# EAGLE board Qwiic-Bluetooth-HC1X-Panel (EAGLE 9.0.1), part 1 of 2
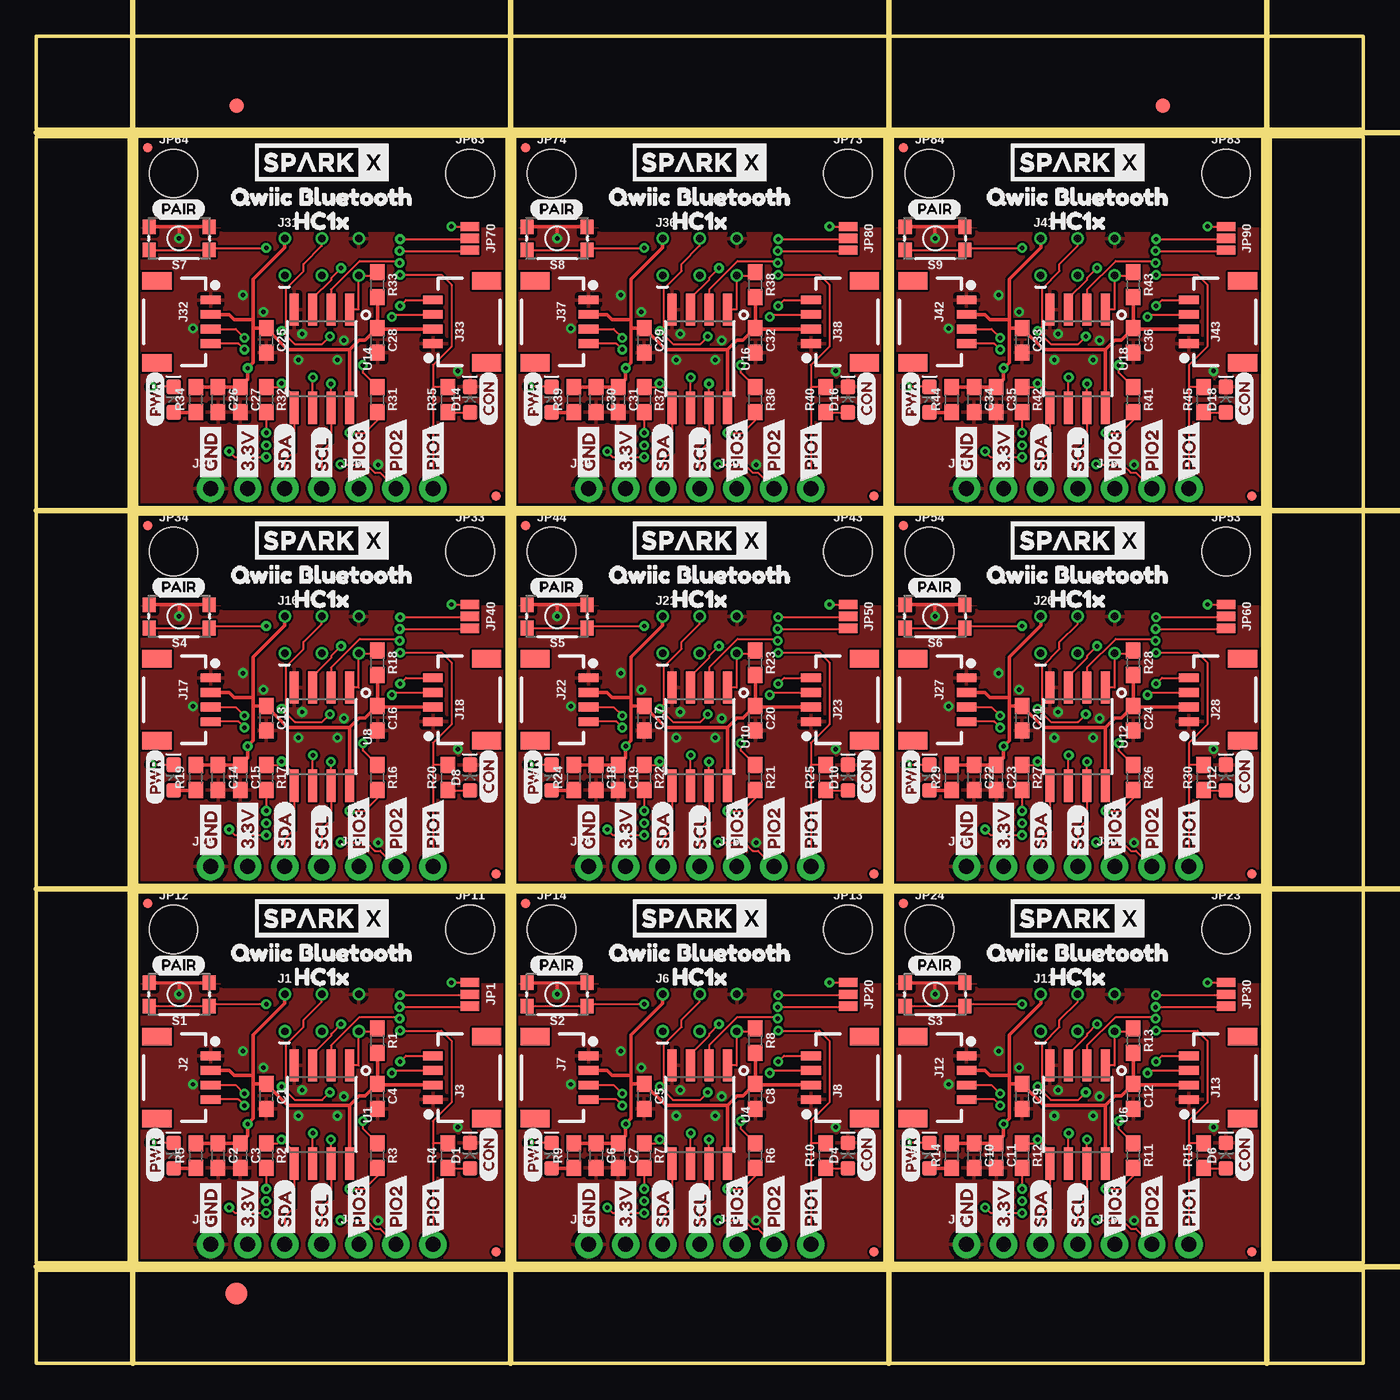
[diagram p0: board, top side]
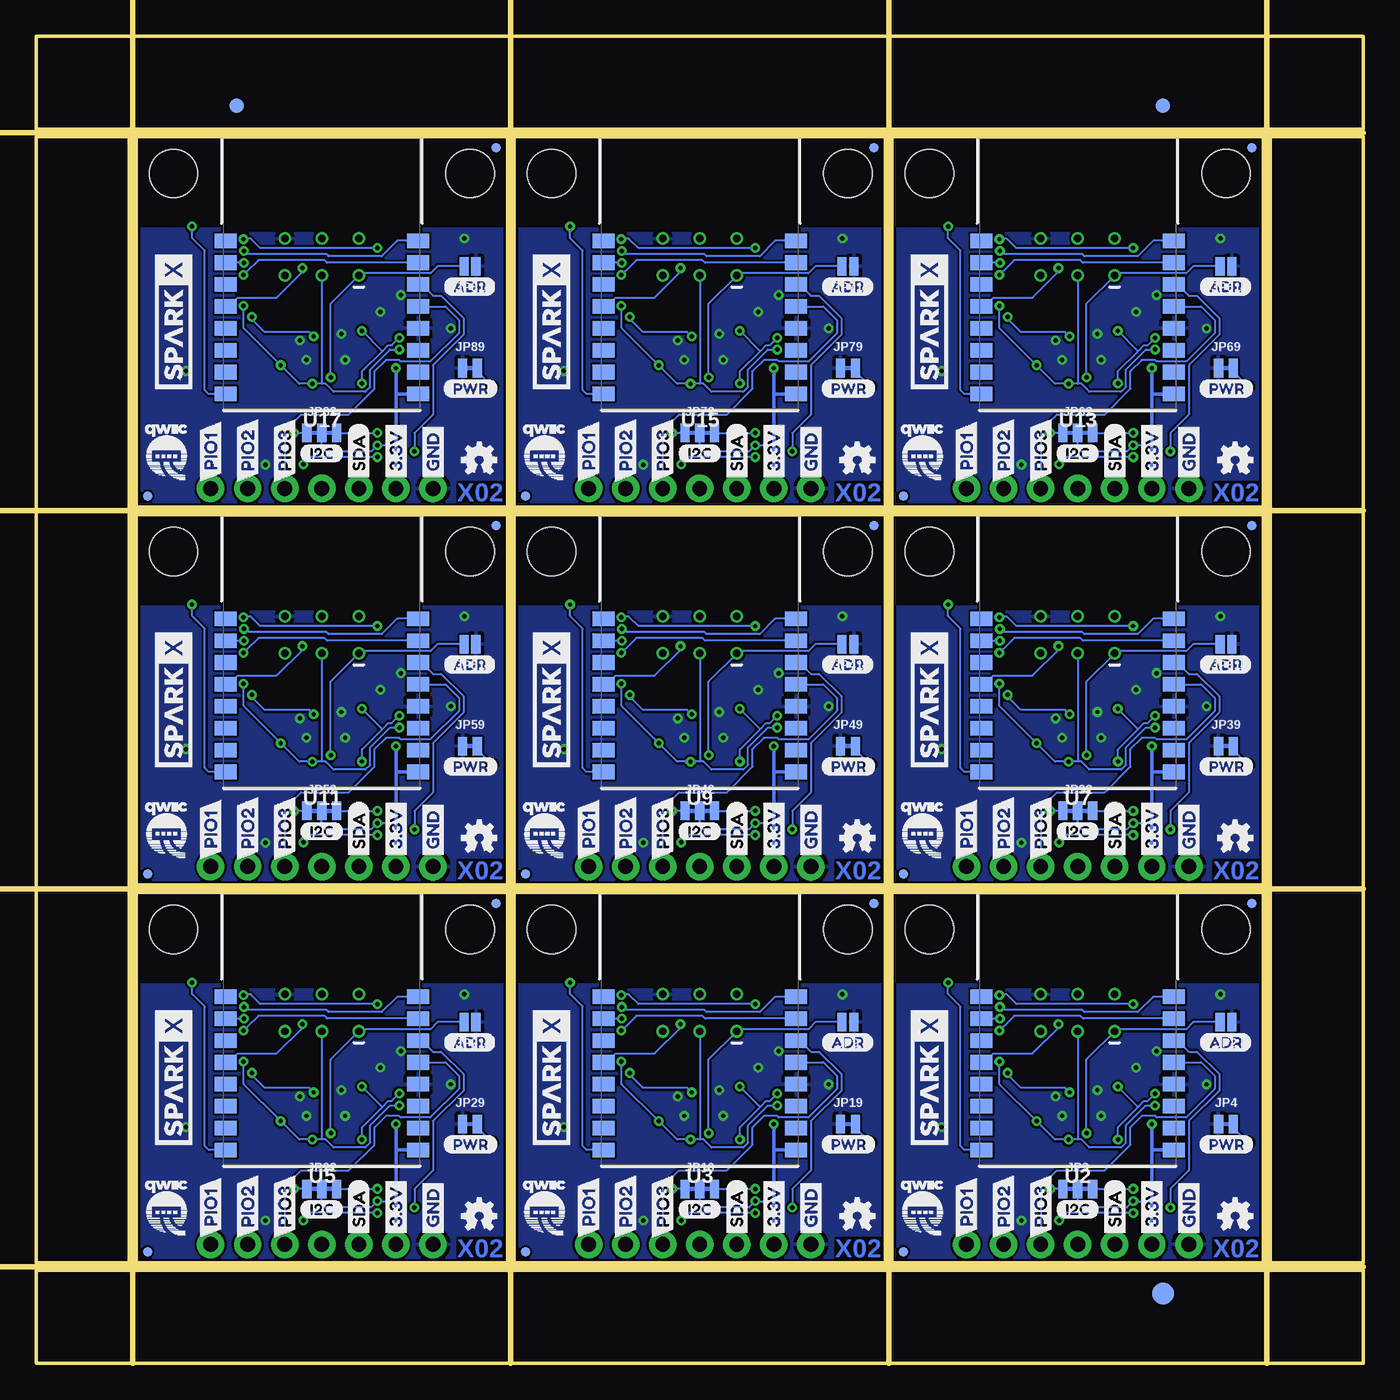
[diagram p1: board, bottom side, seen from below]

Size 90.93 x 90.93 mm. Coordinates in mm from the lower left corner, seen from the top.
Outline: 6.86,6.86 32.26,6.86 32.26,32.26 6.86,32.26 6.86,6.86
Outline: 32.77,6.86 58.17,6.86 58.17,32.26 32.77,32.26 32.77,6.86
Outline: 58.67,6.86 84.07,6.86 84.07,32.26 58.67,32.26 58.67,6.86
Outline: 6.86,32.77 32.26,32.77 32.26,58.17 6.86,58.17 6.86,32.77
Outline: 32.77,32.77 58.17,32.77 58.17,58.17 32.77,58.17 32.77,32.77
Outline: 58.67,32.77 84.07,32.77 84.07,58.17 58.67,58.17 58.67,32.77
Outline: 6.86,58.67 32.26,58.67 32.26,84.07 6.86,84.07 6.86,58.67
Outline: 32.77,58.67 58.17,58.67 58.17,84.07 32.77,84.07 32.77,58.67
Outline: 58.67,58.67 84.07,58.67 84.07,84.07 58.67,84.07 58.67,58.67
Outline: 0,6.35 90.93,6.35 90.93,0 0,0 0,6.35
Outline: 84.58,84.07 90.93,84.07 90.93,6.86 84.58,6.86 84.58,84.07
Outline: 0,90.93 90.93,90.93 90.93,84.58 0,84.58 0,90.93
Outline: 0,84.07 6.35,84.07 6.35,6.86 0,6.86 0,84.07
Copper layers (1*16): Top 0.035mm / dielectric 1.5mm / Bottom 0.035mm
Design rules "SparkFun-2-layer-PCBWay-LIMIT": minimum track width 6mil, minimum drill 0.3mm, track to track 6mil, track to pad 6mil, pad to pad 6mil, via to via 6mil, smd to smd 6mil, copper to edge 6mil, drill to drill 6mil, minimum pad ring 7mil, minimum via ring 7mil, stop-mask expansion 4mil, vias tented up to drill 25mil, thermal gap 10mil
Milling: 8 lines

## Footprints (pad centres in the part's own frame; a part is rotated, then mirrored left to right if it is on the bottom)
0603 = smd 1.1 x 1: 1 -0.85,0; 2 0.85,0
LED-0603 = smd 1 x 1: A -0.877,0; C 0.877,0
FIDUCIAL-1X2 = smd 1 x 1: 1 0,0
FIDUCIAL-1.5X3 = smd 1.5 x 1.5: 1 0,0
2X3_TEST_POINTS = drill 0.508: 1 -2.54,-1.27; 2 -2.54,1.27; 3 0,-1.27; 4 0,1.27; 5 2.54,-1.27; 6 2.54,1.27
1X04_1MM_RA = smd 0.6 x 1.35: 1 -1.5,0; 2 -0.5,0; 3 0.5,0; 4 1.5,0 | smd 1.2 x 2: NC1 2.8,-3.675; NC2 -2.8,-3.675
1X04_NO_SILK = drill 1.016 pad 1.88: 1 0,0; 2 2.54,0; 3 5.08,0; 4 7.62,0
1X03_NO_SILK = drill 1.016 pad 1.88: 1 0,0; 2 2.54,0; 3 5.08,0
SMT-JUMPER_3_1-NC_PASTE_NO-SILK = smd 0.635 x 1.27: 1 -0.813,0; 2 0,0; 3 0.813,0
SMT-JUMPER_2_NO_NO-SILK = smd 0.635 x 1.27: 1 -0.406,0; 2 0.406,0
SMT-JUMPER_3_2-NC_TRACE_NO-SILK = smd 0.635 x 1.27: 1 -1.016,0; 2 0,0; 3 1.016,0
SMT-JUMPER_2_NC_TRACE_NO-SILK = smd 0.635 x 1.27: 1 -0.508,0; 2 0.508,0
FIDUCIAL-MICRO = smd 0.635 x 0.635: 1 0,0
STAND-OFF = hole 3.302: 0,0
TACTILE_SWITCH_SMD_4.6X2.8MM = smd 0.9 x 1: 1 -2.05,-0.8; 2 2.05,-0.8; 3 2.05,0.8; 4 -2.05,0.8
SO08-EIAJ_MCU = smd 0.61 x 2.21: 1 -1.905,-3.378; 2 -0.635,-3.378; 3 0.635,-3.378; 4 1.905,-3.378; 5 1.905,3.353; 6 0.635,3.353; 7 -0.635,3.353; 8 -1.905,3.353
HM-11 = smd 1.5 x 1: 1 -6.6,2.25; 2 -6.6,0.75; 3 -6.6,-0.75; 4 -6.6,-2.25; 5 -6.6,-3.75; 6 -6.6,-5.25; 7 -6.6,-6.75; 8 -6.6,-8.25; 9 6.6,-8.25; 10 6.6,-6.75; 11 6.6,-5.25; 12 6.6,-3.75; 13 6.6,-2.25; 14 6.6,-0.75; 15 6.6,0.75; 16 6.6,2.25

## Placement (x,y rotation side)
C1  0.1uF  [0603]  15.75,18.29 270 top
C2  0.1uF  [0603]  12.45,14.22 270 top
C3  4.7uF  [0603]  13.97,14.22 270 top
C4  10uF  [0603]  23.37,18.29 270 top
C5  0.1uF  [0603]  41.66,18.29 270 top
C6  0.1uF  [0603]  38.35,14.22 270 top
C7  4.7uF  [0603]  39.88,14.22 270 top
C8  10uF  [0603]  49.28,18.29 270 top
C9  0.1uF  [0603]  67.56,18.29 270 top
C10  0.1uF  [0603]  64.26,14.22 270 top
C11  4.7uF  [0603]  65.79,14.22 270 top
C12  10uF  [0603]  75.18,18.29 270 top
C13  0.1uF  [0603]  15.75,44.2 270 top
C14  0.1uF  [0603]  12.45,40.13 270 top
C15  4.7uF  [0603]  13.97,40.13 270 top
C16  10uF  [0603]  23.37,44.2 270 top
C17  0.1uF  [0603]  41.66,44.2 270 top
C18  0.1uF  [0603]  38.35,40.13 270 top
C19  4.7uF  [0603]  39.88,40.13 270 top
C20  10uF  [0603]  49.28,44.2 270 top
C21  0.1uF  [0603]  67.56,44.2 270 top
C22  0.1uF  [0603]  64.26,40.13 270 top
C23  4.7uF  [0603]  65.79,40.13 270 top
C24  10uF  [0603]  75.18,44.2 270 top
C25  0.1uF  [0603]  15.75,70.1 270 top
C26  0.1uF  [0603]  12.45,66.04 270 top
C27  4.7uF  [0603]  13.97,66.04 270 top
C28  10uF  [0603]  23.37,70.1 270 top
C29  0.1uF  [0603]  41.66,70.1 270 top
C30  0.1uF  [0603]  38.35,66.04 270 top
C31  4.7uF  [0603]  39.88,66.04 270 top
C32  10uF  [0603]  49.28,70.1 270 top
C33  0.1uF  [0603]  67.56,70.1 270 top
C34  0.1uF  [0603]  64.26,66.04 270 top
C35  4.7uF  [0603]  65.79,66.04 270 top
C36  10uF  [0603]  75.18,70.1 270 top
D1  GREEN  [LED-0603]  29.72,14.22 90 top
D2  RED  [LED-0603]  9.4,14.22 90 top
D3  RED  [LED-0603]  35.31,14.22 90 top
D4  GREEN  [LED-0603]  55.63,14.22 90 top
D5  RED  [LED-0603]  61.21,14.22 90 top
D6  GREEN  [LED-0603]  81.53,14.22 90 top
D7  RED  [LED-0603]  9.4,40.13 90 top
D8  GREEN  [LED-0603]  29.72,40.13 90 top
D9  RED  [LED-0603]  35.31,40.13 90 top
D10  GREEN  [LED-0603]  55.63,40.13 90 top
D11  RED  [LED-0603]  61.21,40.13 90 top
D12  GREEN  [LED-0603]  81.53,40.13 90 top
D13  RED  [LED-0603]  9.4,66.04 90 top
D14  GREEN  [LED-0603]  29.72,66.04 90 top
D15  RED  [LED-0603]  35.31,66.04 90 top
D16  GREEN  [LED-0603]  55.63,66.04 90 top
D17  RED  [LED-0603]  61.21,66.04 90 top
D18  GREEN  [LED-0603]  81.53,66.04 90 top
E$1  [FIDUCIAL-1X2]  13.72,86.17 0 top
E$2  [FIDUCIAL-1X2]  13.72,86.17 0 bottom
E$3  [FIDUCIAL-1X2]  77.22,86.17 0 top
E$4  [FIDUCIAL-1X2]  77.22,86.17 0 bottom
E$5  [FIDUCIAL-1.5X3]  13.72,4.76 0 top
E$6  [FIDUCIAL-1.5X3]  13.72,4.76 0 bottom
J1  ISP  [2X3_TEST_POINTS]  19.56,24 0 top
J2  Qwiic-L  [1X04_1MM_RA]  11.94,19.56 270 top
J3  Qwiic-R  [1X04_1MM_RA]  27.18,19.56 90 top
J4  I2C  [1X04_NO_SILK]  11.94,8.13 0 top
J5  PIO  [1X03_NO_SILK]  22.1,8.13 0 top
J6  ISP  [2X3_TEST_POINTS]  45.47,24 0 top
J7  Qwiic-L  [1X04_1MM_RA]  37.85,19.56 270 top
J8  Qwiic-R  [1X04_1MM_RA]  53.09,19.56 90 top
J9  I2C  [1X04_NO_SILK]  37.85,8.13 0 top
J10  PIO  [1X03_NO_SILK]  48.01,8.13 0 top
J11  ISP  [2X3_TEST_POINTS]  71.37,24 0 top
J12  Qwiic-L  [1X04_1MM_RA]  63.75,19.56 270 top
J13  Qwiic-R  [1X04_1MM_RA]  78.99,19.56 90 top
J14  I2C  [1X04_NO_SILK]  63.75,8.13 0 top
J15  PIO  [1X03_NO_SILK]  73.91,8.13 0 top
J16  ISP  [2X3_TEST_POINTS]  19.56,49.91 0 top
J17  Qwiic-L  [1X04_1MM_RA]  11.94,45.47 270 top
J18  Qwiic-R  [1X04_1MM_RA]  27.18,45.47 90 top
J19  I2C  [1X04_NO_SILK]  11.94,34.04 0 top
J20  PIO  [1X03_NO_SILK]  22.1,34.04 0 top
J21  ISP  [2X3_TEST_POINTS]  45.47,49.91 0 top
J22  Qwiic-L  [1X04_1MM_RA]  37.85,45.47 270 top
J23  Qwiic-R  [1X04_1MM_RA]  53.09,45.47 90 top
J24  I2C  [1X04_NO_SILK]  37.85,34.04 0 top
J25  PIO  [1X03_NO_SILK]  48.01,34.04 0 top
J26  ISP  [2X3_TEST_POINTS]  71.37,49.91 0 top
J27  Qwiic-L  [1X04_1MM_RA]  63.75,45.47 270 top
J28  Qwiic-R  [1X04_1MM_RA]  78.99,45.47 90 top
J29  I2C  [1X04_NO_SILK]  63.75,34.04 0 top
J30  PIO  [1X03_NO_SILK]  73.91,34.04 0 top
J31  ISP  [2X3_TEST_POINTS]  19.56,75.82 0 top
J32  Qwiic-L  [1X04_1MM_RA]  11.94,71.37 270 top
J33  Qwiic-R  [1X04_1MM_RA]  27.18,71.37 90 top
J34  I2C  [1X04_NO_SILK]  11.94,59.94 0 top
J35  PIO  [1X03_NO_SILK]  22.1,59.94 0 top
J36  ISP  [2X3_TEST_POINTS]  45.47,75.82 0 top
J37  Qwiic-L  [1X04_1MM_RA]  37.85,71.37 270 top
J38  Qwiic-R  [1X04_1MM_RA]  53.09,71.37 90 top
J39  I2C  [1X04_NO_SILK]  37.85,59.94 0 top
J40  PIO  [1X03_NO_SILK]  48.01,59.94 0 top
J41  ISP  [2X3_TEST_POINTS]  71.37,75.82 0 top
J42  Qwiic-L  [1X04_1MM_RA]  63.75,71.37 270 top
J43  Qwiic-R  [1X04_1MM_RA]  78.99,71.37 90 top
J44  I2C  [1X04_NO_SILK]  63.75,59.94 0 top
J45  PIO  [1X03_NO_SILK]  73.91,59.94 0 top
JP1  Key-Select  [SMT-JUMPER_3_1-NC_PASTE_NO-SILK]  29.72,25.27 270 top
JP2  ADR  [SMT-JUMPER_2_NO_NO-SILK]  9.4,23.37 180 bottom
JP3  I2C  [SMT-JUMPER_3_2-NC_TRACE_NO-SILK]  19.56,11.94 0 bottom
JP4  PWR-LED  [SMT-JUMPER_2_NC_TRACE_NO-SILK]  9.4,16.38 0 bottom
JP5  FIDUCIALUFIDUCIAL  [FIDUCIAL-MICRO]  31.5,7.62 0 bottom
JP6  FIDUCIALUFIDUCIAL  [FIDUCIAL-MICRO]  31.5,7.62 0 top
JP7  FIDUCIALUFIDUCIAL  [FIDUCIAL-MICRO]  7.62,31.5 0 top
JP8  FIDUCIALUFIDUCIAL  [FIDUCIAL-MICRO]  7.62,31.5 0 bottom
JP9  ADR  [SMT-JUMPER_2_NO_NO-SILK]  35.31,23.37 180 bottom
JP10  I2C  [SMT-JUMPER_3_2-NC_TRACE_NO-SILK]  45.47,11.94 0 bottom
JP11  STAND-OFF  [STAND-OFF]  29.72,29.72 0 top
JP12  STAND-OFF  [STAND-OFF]  9.4,29.72 0 top
JP13  STAND-OFF  [STAND-OFF]  55.63,29.72 0 top
JP14  STAND-OFF  [STAND-OFF]  35.31,29.72 0 top
JP15  FIDUCIALUFIDUCIAL  [FIDUCIAL-MICRO]  57.4,7.62 0 bottom
JP16  FIDUCIALUFIDUCIAL  [FIDUCIAL-MICRO]  33.53,31.5 0 top
JP17  FIDUCIALUFIDUCIAL  [FIDUCIAL-MICRO]  33.53,31.5 0 bottom
JP18  FIDUCIALUFIDUCIAL  [FIDUCIAL-MICRO]  57.4,7.62 0 top
JP19  PWR-LED  [SMT-JUMPER_2_NC_TRACE_NO-SILK]  35.31,16.38 0 bottom
JP20  Key-Select  [SMT-JUMPER_3_1-NC_PASTE_NO-SILK]  55.63,25.27 270 top
JP21  ADR  [SMT-JUMPER_2_NO_NO-SILK]  61.21,23.37 180 bottom
JP22  I2C  [SMT-JUMPER_3_2-NC_TRACE_NO-SILK]  71.37,11.94 0 bottom
JP23  STAND-OFF  [STAND-OFF]  81.53,29.72 0 top
JP24  STAND-OFF  [STAND-OFF]  61.21,29.72 0 top
JP25  FIDUCIALUFIDUCIAL  [FIDUCIAL-MICRO]  83.31,7.62 0 bottom
JP26  FIDUCIALUFIDUCIAL  [FIDUCIAL-MICRO]  59.44,31.5 0 top
JP27  FIDUCIALUFIDUCIAL  [FIDUCIAL-MICRO]  59.44,31.5 0 bottom
JP28  FIDUCIALUFIDUCIAL  [FIDUCIAL-MICRO]  83.31,7.62 0 top
JP29  PWR-LED  [SMT-JUMPER_2_NC_TRACE_NO-SILK]  61.21,16.38 0 bottom
JP30  Key-Select  [SMT-JUMPER_3_1-NC_PASTE_NO-SILK]  81.53,25.27 270 top
JP31  ADR  [SMT-JUMPER_2_NO_NO-SILK]  9.4,49.28 180 bottom
JP32  I2C  [SMT-JUMPER_3_2-NC_TRACE_NO-SILK]  19.56,37.85 0 bottom
JP33  STAND-OFF  [STAND-OFF]  29.72,55.63 0 top
JP34  STAND-OFF  [STAND-OFF]  9.4,55.63 0 top
JP35  FIDUCIALUFIDUCIAL  [FIDUCIAL-MICRO]  31.5,33.53 0 bottom
JP36  FIDUCIALUFIDUCIAL  [FIDUCIAL-MICRO]  7.62,57.4 0 top
JP37  FIDUCIALUFIDUCIAL  [FIDUCIAL-MICRO]  7.62,57.4 0 bottom
JP38  FIDUCIALUFIDUCIAL  [FIDUCIAL-MICRO]  31.5,33.53 0 top
JP39  PWR-LED  [SMT-JUMPER_2_NC_TRACE_NO-SILK]  9.4,42.29 0 bottom
JP40  Key-Select  [SMT-JUMPER_3_1-NC_PASTE_NO-SILK]  29.72,51.18 270 top
JP41  ADR  [SMT-JUMPER_2_NO_NO-SILK]  35.31,49.28 180 bottom
JP42  I2C  [SMT-JUMPER_3_2-NC_TRACE_NO-SILK]  45.47,37.85 0 bottom
JP43  STAND-OFF  [STAND-OFF]  55.63,55.63 0 top
JP44  STAND-OFF  [STAND-OFF]  35.31,55.63 0 top
JP45  FIDUCIALUFIDUCIAL  [FIDUCIAL-MICRO]  57.4,33.53 0 bottom
JP46  FIDUCIALUFIDUCIAL  [FIDUCIAL-MICRO]  33.53,57.4 0 top
JP47  FIDUCIALUFIDUCIAL  [FIDUCIAL-MICRO]  33.53,57.4 0 bottom
JP48  FIDUCIALUFIDUCIAL  [FIDUCIAL-MICRO]  57.4,33.53 0 top
JP49  PWR-LED  [SMT-JUMPER_2_NC_TRACE_NO-SILK]  35.31,42.29 0 bottom
JP50  Key-Select  [SMT-JUMPER_3_1-NC_PASTE_NO-SILK]  55.63,51.18 270 top
JP51  ADR  [SMT-JUMPER_2_NO_NO-SILK]  61.21,49.28 180 bottom
JP52  I2C  [SMT-JUMPER_3_2-NC_TRACE_NO-SILK]  71.37,37.85 0 bottom
JP53  STAND-OFF  [STAND-OFF]  81.53,55.63 0 top
JP54  STAND-OFF  [STAND-OFF]  61.21,55.63 0 top
JP55  FIDUCIALUFIDUCIAL  [FIDUCIAL-MICRO]  83.31,33.53 0 bottom
JP56  FIDUCIALUFIDUCIAL  [FIDUCIAL-MICRO]  59.44,57.4 0 top
JP57  FIDUCIALUFIDUCIAL  [FIDUCIAL-MICRO]  59.44,57.4 0 bottom
JP58  FIDUCIALUFIDUCIAL  [FIDUCIAL-MICRO]  83.31,33.53 0 top
JP59  PWR-LED  [SMT-JUMPER_2_NC_TRACE_NO-SILK]  61.21,42.29 0 bottom
JP60  Key-Select  [SMT-JUMPER_3_1-NC_PASTE_NO-SILK]  81.53,51.18 270 top
JP61  ADR  [SMT-JUMPER_2_NO_NO-SILK]  9.4,75.18 180 bottom
JP62  I2C  [SMT-JUMPER_3_2-NC_TRACE_NO-SILK]  19.56,63.75 0 bottom
JP63  STAND-OFF  [STAND-OFF]  29.72,81.53 0 top
JP64  STAND-OFF  [STAND-OFF]  9.4,81.53 0 top
JP65  FIDUCIALUFIDUCIAL  [FIDUCIAL-MICRO]  31.5,59.44 0 bottom
JP66  FIDUCIALUFIDUCIAL  [FIDUCIAL-MICRO]  7.62,83.31 0 top
JP67  FIDUCIALUFIDUCIAL  [FIDUCIAL-MICRO]  7.62,83.31 0 bottom
JP68  FIDUCIALUFIDUCIAL  [FIDUCIAL-MICRO]  31.5,59.44 0 top
JP69  PWR-LED  [SMT-JUMPER_2_NC_TRACE_NO-SILK]  9.4,68.2 0 bottom
JP70  Key-Select  [SMT-JUMPER_3_1-NC_PASTE_NO-SILK]  29.72,77.09 270 top
JP71  ADR  [SMT-JUMPER_2_NO_NO-SILK]  35.31,75.18 180 bottom
JP72  I2C  [SMT-JUMPER_3_2-NC_TRACE_NO-SILK]  45.47,63.75 0 bottom
JP73  STAND-OFF  [STAND-OFF]  55.63,81.53 0 top
JP74  STAND-OFF  [STAND-OFF]  35.31,81.53 0 top
JP75  FIDUCIALUFIDUCIAL  [FIDUCIAL-MICRO]  57.4,59.44 0 bottom
JP76  FIDUCIALUFIDUCIAL  [FIDUCIAL-MICRO]  33.53,83.31 0 top
JP77  FIDUCIALUFIDUCIAL  [FIDUCIAL-MICRO]  33.53,83.31 0 bottom
JP78  FIDUCIALUFIDUCIAL  [FIDUCIAL-MICRO]  57.4,59.44 0 top
JP79  PWR-LED  [SMT-JUMPER_2_NC_TRACE_NO-SILK]  35.31,68.2 0 bottom
JP80  Key-Select  [SMT-JUMPER_3_1-NC_PASTE_NO-SILK]  55.63,77.09 270 top
JP81  ADR  [SMT-JUMPER_2_NO_NO-SILK]  61.21,75.18 180 bottom
JP82  I2C  [SMT-JUMPER_3_2-NC_TRACE_NO-SILK]  71.37,63.75 0 bottom
JP83  STAND-OFF  [STAND-OFF]  81.53,81.53 0 top
JP84  STAND-OFF  [STAND-OFF]  61.21,81.53 0 top
JP85  FIDUCIALUFIDUCIAL  [FIDUCIAL-MICRO]  83.31,59.44 0 bottom
JP86  FIDUCIALUFIDUCIAL  [FIDUCIAL-MICRO]  59.44,83.31 0 top
JP87  FIDUCIALUFIDUCIAL  [FIDUCIAL-MICRO]  59.44,83.31 0 bottom
JP88  FIDUCIALUFIDUCIAL  [FIDUCIAL-MICRO]  83.31,59.44 0 top
JP89  PWR-LED  [SMT-JUMPER_2_NC_TRACE_NO-SILK]  61.21,68.2 0 bottom
JP90  Key-Select  [SMT-JUMPER_3_1-NC_PASTE_NO-SILK]  81.53,77.09 270 top
LOGO1  OSHW-LOGOMINI  [OSHW-LOGO-MINI]  8.76,10.1 0 bottom
LOGO2  SPARKX-LOGO4  [SPARKX-MEDIUM]  29.72,19.56 90 bottom
LOGO3  SPARKX-LOGO4  [SPARKX-MEDIUM]  19.56,30.48 0 top
LOGO4  SPARKX-LOGO4  [SPARKX-MEDIUM]  45.47,30.48 0 top
LOGO5  OSHW-LOGOMINI  [OSHW-LOGO-MINI]  34.67,10.1 0 bottom
LOGO6  SPARKX-LOGO4  [SPARKX-MEDIUM]  55.63,19.56 90 bottom
LOGO7  SPARKX-LOGO4  [SPARKX-MEDIUM]  71.37,30.48 0 top
LOGO8  OSHW-LOGOMINI  [OSHW-LOGO-MINI]  60.58,10.1 0 bottom
LOGO9  SPARKX-LOGO4  [SPARKX-MEDIUM]  81.53,19.56 90 bottom
LOGO10  SPARKX-LOGO4  [SPARKX-MEDIUM]  19.56,56.39 0 top
LOGO11  OSHW-LOGOMINI  [OSHW-LOGO-MINI]  8.76,36 0 bottom
LOGO12  SPARKX-LOGO4  [SPARKX-MEDIUM]  29.72,45.47 90 bottom
LOGO13  SPARKX-LOGO4  [SPARKX-MEDIUM]  45.47,56.39 0 top
LOGO14  OSHW-LOGOMINI  [OSHW-LOGO-MINI]  34.67,36 0 bottom
LOGO15  SPARKX-LOGO4  [SPARKX-MEDIUM]  55.63,45.47 90 bottom
LOGO16  SPARKX-LOGO4  [SPARKX-MEDIUM]  71.37,56.39 0 top
LOGO17  OSHW-LOGOMINI  [OSHW-LOGO-MINI]  60.58,36 0 bottom
LOGO18  SPARKX-LOGO4  [SPARKX-MEDIUM]  81.53,45.47 90 bottom
LOGO19  SPARKX-LOGO4  [SPARKX-MEDIUM]  19.56,82.3 0 top
LOGO20  OSHW-LOGOMINI  [OSHW-LOGO-MINI]  8.76,61.91 0 bottom
LOGO21  SPARKX-LOGO4  [SPARKX-MEDIUM]  29.72,71.37 90 bottom
LOGO22  SPARKX-LOGO4  [SPARKX-MEDIUM]  45.47,82.3 0 top
LOGO23  OSHW-LOGOMINI  [OSHW-LOGO-MINI]  34.67,61.91 0 bottom
LOGO24  SPARKX-LOGO4  [SPARKX-MEDIUM]  55.63,71.37 90 bottom
LOGO25  SPARKX-LOGO4  [SPARKX-MEDIUM]  71.37,82.3 0 top
LOGO26  OSHW-LOGOMINI  [OSHW-LOGO-MINI]  60.58,61.91 0 bottom
LOGO27  SPARKX-LOGO4  [SPARKX-MEDIUM]  81.53,71.37 90 bottom
R1  4.7k  [0603]  23.37,22.1 270 top
R2  2.2k  [0603]  15.75,14.22 270 top
R3  2.2k  [0603]  23.37,14.22 270 top
R4  330  [0603]  28.19,14.22 90 top
R5  1k  [0603]  10.92,14.22 90 top
R6  2.2k  [0603]  49.28,14.22 270 top
R7  2.2k  [0603]  41.66,14.22 270 top
R8  4.7k  [0603]  49.28,22.1 270 top
R9  1k  [0603]  36.83,14.22 90 top
R10  330  [0603]  54.1,14.22 90 top
R11  2.2k  [0603]  75.18,14.22 270 top
R12  2.2k  [0603]  67.56,14.22 270 top
R13  4.7k  [0603]  75.18,22.1 270 top
R14  1k  [0603]  62.74,14.22 90 top
R15  330  [0603]  80.01,14.22 90 top
R16  2.2k  [0603]  23.37,40.13 270 top
R17  2.2k  [0603]  15.75,40.13 270 top
R18  4.7k  [0603]  23.37,48.01 270 top
R19  1k  [0603]  10.92,40.13 90 top
R20  330  [0603]  28.19,40.13 90 top
R21  2.2k  [0603]  49.28,40.13 270 top
R22  2.2k  [0603]  41.66,40.13 270 top
R23  4.7k  [0603]  49.28,48.01 270 top
R24  1k  [0603]  36.83,40.13 90 top
R25  330  [0603]  54.1,40.13 90 top
R26  2.2k  [0603]  75.18,40.13 270 top
R27  2.2k  [0603]  67.56,40.13 270 top
R28  4.7k  [0603]  75.18,48.01 270 top
R29  1k  [0603]  62.74,40.13 90 top
R30  330  [0603]  80.01,40.13 90 top
R31  2.2k  [0603]  23.37,66.04 270 top
R32  2.2k  [0603]  15.75,66.04 270 top
R33  4.7k  [0603]  23.37,73.91 270 top
R34  1k  [0603]  10.92,66.04 90 top
R35  330  [0603]  28.19,66.04 90 top
R36  2.2k  [0603]  49.28,66.04 270 top
R37  2.2k  [0603]  41.66,66.04 270 top
R38  4.7k  [0603]  49.28,73.91 270 top
R39  1k  [0603]  36.83,66.04 90 top
R40  330  [0603]  54.1,66.04 90 top
R41  2.2k  [0603]  75.18,66.04 270 top
R42  2.2k  [0603]  67.56,66.04 270 top
R43  4.7k  [0603]  75.18,73.91 270 top
R44  1k  [0603]  62.74,66.04 90 top
R45  330  [0603]  80.01,66.04 90 top
S1  KEY  [TACTILE_SWITCH_SMD_4.6X2.8MM]  9.78,25.27 180 top
S2  KEY  [TACTILE_SWITCH_SMD_4.6X2.8MM]  35.69,25.27 180 top
S3  KEY  [TACTILE_SWITCH_SMD_4.6X2.8MM]  61.59,25.27 180 top
S4  KEY  [TACTILE_SWITCH_SMD_4.6X2.8MM]  9.78,51.18 180 top
S5  KEY  [TACTILE_SWITCH_SMD_4.6X2.8MM]  35.69,51.18 180 top
S6  KEY  [TACTILE_SWITCH_SMD_4.6X2.8MM]  61.59,51.18 180 top
S7  KEY  [TACTILE_SWITCH_SMD_4.6X2.8MM]  9.78,77.09 180 top
S8  KEY  [TACTILE_SWITCH_SMD_4.6X2.8MM]  35.69,77.09 180 top
S9  KEY  [TACTILE_SWITCH_SMD_4.6X2.8MM]  61.59,77.09 180 top
U1  ATTiny85-Arduino  [SO08-EIAJ_MCU]  19.56,17.02 180 top
U2  HM-17  [HM-11]  19.56,22.86 0 bottom
U3  HM-17  [HM-11]  45.47,22.86 0 bottom
U4  ATTiny85-Arduino  [SO08-EIAJ_MCU]  45.47,17.02 180 top
U5  HM-17  [HM-11]  71.37,22.86 0 bottom
U6  ATTiny85-Arduino  [SO08-EIAJ_MCU]  71.37,17.02 180 top
U7  HM-17  [HM-11]  19.56,48.77 0 bottom
U8  ATTiny85-Arduino  [SO08-EIAJ_MCU]  19.56,42.93 180 top
U9  HM-17  [HM-11]  45.47,48.77 0 bottom
U10  ATTiny85-Arduino  [SO08-EIAJ_MCU]  45.47,42.93 180 top
U11  HM-17  [HM-11]  71.37,48.77 0 bottom
U12  ATTiny85-Arduino  [SO08-EIAJ_MCU]  71.37,42.93 180 top
U13  HM-17  [HM-11]  19.56,74.68 0 bottom
U14  ATTiny85-Arduino  [SO08-EIAJ_MCU]  19.56,68.83 180 top
U15  HM-17  [HM-11]  45.47,74.68 0 bottom
U16  ATTiny85-Arduino  [SO08-EIAJ_MCU]  45.47,68.83 180 top
U17  HM-17  [HM-11]  71.37,74.68 0 bottom
U18  ATTiny85-Arduino  [SO08-EIAJ_MCU]  71.37,68.83 180 top
U$1  [SDA4]  17.02,8.51 90 bottom
U$2  [HC1X12]  16.64,26.48 0 top
U$3  [PIO110]  27.18,8.57 90 top
U$4  [GND0]  11.94,8.51 90 top
U$5  [3#3V1]  14.48,8.51 90 top
U$6  [SDA4]  17.02,8.51 90 top
U$7  [SCL2]  19.56,8.32 90 top
U$8  [PIO33]  22.1,8.51 90 top
U$9  [PIO29]  24.64,8.51 90 top
U$10  [GND0]  11.94,8.51 90 bottom
U$11  [3#3V1]  14.48,8.51 90 bottom
U$12  [GND0]  37.85,8.51 90 top
U$13  [PWR5]  11.24,14.99 0 bottom
U$14  [PIO33]  22.1,8.51 90 bottom
U$15  [PIO29]  24.64,8.51 90 bottom
U$16  [PWR5]  8.13,12.38 90 top
U$17  [CON13]  30.99,12.45 90 top
U$18  [QWIIC_BLUETOOTH11]  12.32,28.13 0 top
U$19  [ADR8]  11.24,21.97 0 bottom
U$20  [I2C7]  21.08,10.54 0 bottom
U$21  [QWIIC-LOGO-SMALL]  30.29,10.6 0 bottom
U$22  [PIO110]  27.18,8.57 90 bottom
U$23  [PAIR15]  7.87,27.3 0 top
U$24  [3#3V1]  40.39,8.51 90 top
U$25  [SDA4]  42.93,8.51 90 top
U$26  [SCL2]  45.47,8.32 90 top
U$27  [PIO33]  48.01,8.51 90 top
U$28  [PIO29]  50.55,8.51 90 top
U$29  [GND0]  37.85,8.51 90 bottom
U$30  [3#3V1]  40.39,8.51 90 bottom
U$31  [PIO33]  48.01,8.51 90 bottom
U$32  [PIO29]  50.55,8.51 90 bottom
U$33  [PWR5]  34.04,12.38 90 top
U$34  [CON13]  56.9,12.45 90 top
U$35  [QWIIC_BLUETOOTH11]  38.23,28.13 0 top
U$36  [ADR8]  37.15,21.97 0 bottom
U$37  [I2C7]  46.99,10.54 0 bottom
U$38  [PWR5]  37.15,14.99 0 bottom
U$39  [QWIIC-LOGO-SMALL]  56.2,10.6 0 bottom
U$40  [SDA4]  42.93,8.51 90 bottom
U$41  [PIO110]  53.09,8.57 90 top
U$42  [PIO110]  53.09,8.57 90 bottom
U$43  [HC1X12]  42.54,26.48 0 top
U$44  [PAIR15]  33.78,27.3 0 top
U$45  [GND0]  63.75,8.51 90 top
U$46  [3#3V1]  66.29,8.51 90 top
U$47  [SDA4]  68.83,8.51 90 top
U$48  [SCL2]  71.37,8.32 90 top
U$49  [PIO33]  73.91,8.51 90 top
U$50  [PIO29]  76.45,8.51 90 top
U$51  [GND0]  63.75,8.51 90 bottom
U$52  [3#3V1]  66.29,8.51 90 bottom
U$53  [PIO33]  73.91,8.51 90 bottom
U$54  [PIO29]  76.45,8.51 90 bottom
U$55  [PWR5]  59.94,12.38 90 top
U$56  [CON13]  82.8,12.45 90 top
U$57  [QWIIC_BLUETOOTH11]  64.14,28.13 0 top
U$58  [ADR8]  63.06,21.97 0 bottom
U$59  [I2C7]  72.9,10.54 0 bottom
U$60  [PWR5]  63.06,14.99 0 bottom
U$61  [QWIIC-LOGO-SMALL]  82.11,10.6 0 bottom
U$62  [SDA4]  68.83,8.51 90 bottom
U$63  [PIO110]  78.99,8.57 90 top
U$64  [PIO110]  78.99,8.57 90 bottom
U$65  [HC1X12]  68.45,26.48 0 top
U$66  [PAIR15]  59.69,27.3 0 top
U$67  [GND0]  11.94,34.42 90 top
U$68  [3#3V1]  14.48,34.42 90 top
U$69  [SDA4]  17.02,34.42 90 top
U$70  [SCL2]  19.56,34.23 90 top
U$71  [PIO33]  22.1,34.42 90 top
U$72  [PIO29]  24.64,34.42 90 top
U$73  [GND0]  11.94,34.42 90 bottom
U$74  [3#3V1]  14.48,34.42 90 bottom
U$75  [PIO33]  22.1,34.42 90 bottom
U$76  [PIO29]  24.64,34.42 90 bottom
U$77  [PWR5]  8.13,38.29 90 top
U$78  [CON13]  30.99,38.35 90 top
U$79  [QWIIC_BLUETOOTH11]  12.32,54.04 0 top
U$80  [ADR8]  11.24,47.88 0 bottom
U$81  [I2C7]  21.08,36.45 0 bottom
U$82  [PWR5]  11.24,40.89 0 bottom
U$83  [QWIIC-LOGO-SMALL]  30.29,36.51 0 bottom
U$84  [SDA4]  17.02,34.42 90 bottom
U$85  [PIO110]  27.18,34.48 90 top
U$86  [PIO110]  27.18,34.48 90 bottom
U$87  [HC1X12]  16.64,52.39 0 top
U$88  [PAIR15]  7.87,53.21 0 top
U$89  [GND0]  37.85,34.42 90 top
U$90  [3#3V1]  40.39,34.42 90 top
U$91  [SDA4]  42.93,34.42 90 top
U$92  [SCL2]  45.47,34.23 90 top
U$93  [PIO33]  48.01,34.42 90 top
U$94  [PIO29]  50.55,34.42 90 top
U$95  [GND0]  37.85,34.42 90 bottom
U$96  [3#3V1]  40.39,34.42 90 bottom
U$97  [PIO33]  48.01,34.42 90 bottom
U$98  [PIO29]  50.55,34.42 90 bottom
U$99  [PWR5]  34.04,38.29 90 top
U$100  [CON13]  56.9,38.35 90 top
U$101  [QWIIC_BLUETOOTH11]  38.23,54.04 0 top
U$102  [ADR8]  37.15,47.88 0 bottom
U$103  [I2C7]  46.99,36.45 0 bottom
U$104  [PWR5]  37.15,40.89 0 bottom
U$105  [QWIIC-LOGO-SMALL]  56.2,36.51 0 bottom
U$106  [SDA4]  42.93,34.42 90 bottom
U$107  [PIO110]  53.09,34.48 90 top
U$108  [PIO110]  53.09,34.48 90 bottom
U$109  [HC1X12]  42.54,52.39 0 top
U$110  [PAIR15]  33.78,53.21 0 top
U$111  [GND0]  63.75,34.42 90 top
U$112  [3#3V1]  66.29,34.42 90 top
U$113  [SDA4]  68.83,34.42 90 top
U$114  [SCL2]  71.37,34.23 90 top
U$115  [PIO33]  73.91,34.42 90 top
U$116  [PIO29]  76.45,34.42 90 top
U$117  [GND0]  63.75,34.42 90 bottom
U$118  [3#3V1]  66.29,34.42 90 bottom
U$119  [PIO33]  73.91,34.42 90 bottom
U$120  [PIO29]  76.45,34.42 90 bottom
U$121  [PWR5]  59.94,38.29 90 top
U$122  [CON13]  82.8,38.35 90 top
U$123  [QWIIC_BLUETOOTH11]  64.14,54.04 0 top
U$124  [ADR8]  63.06,47.88 0 bottom
U$125  [I2C7]  72.9,36.45 0 bottom
U$126  [PWR5]  63.06,40.89 0 bottom
U$127  [QWIIC-LOGO-SMALL]  82.11,36.51 0 bottom
U$128  [SDA4]  68.83,34.42 90 bottom
U$129  [PIO110]  78.99,34.48 90 top
U$130  [PIO110]  78.99,34.48 90 bottom
U$131  [HC1X12]  68.45,52.39 0 top
U$132  [PAIR15]  59.69,53.21 0 top
U$133  [GND0]  11.94,60.32 90 top
U$134  [3#3V1]  14.48,60.32 90 top
U$135  [SDA4]  17.02,60.32 90 top
U$136  [SCL2]  19.56,60.13 90 top
U$137  [PIO33]  22.1,60.32 90 top
U$138  [PIO29]  24.64,60.32 90 top
U$139  [GND0]  11.94,60.32 90 bottom
U$140  [3#3V1]  14.48,60.32 90 bottom
U$141  [PIO33]  22.1,60.32 90 bottom
U$142  [PIO29]  24.64,60.32 90 bottom
U$143  [PWR5]  8.13,64.2 90 top
U$144  [CON13]  30.99,64.26 90 top
U$145  [QWIIC_BLUETOOTH11]  12.32,79.95 0 top
U$146  [ADR8]  11.24,73.79 0 bottom
U$147  [I2C7]  21.08,62.36 0 bottom
U$148  [PWR5]  11.24,66.8 0 bottom
U$149  [QWIIC-LOGO-SMALL]  30.29,62.42 0 bottom
U$150  [SDA4]  17.02,60.32 90 bottom
U$151  [PIO110]  27.18,60.39 90 top
U$152  [PIO110]  27.18,60.39 90 bottom
U$153  [HC1X12]  16.64,78.3 0 top
U$154  [PAIR15]  7.87,79.12 0 top
U$155  [GND0]  37.85,60.32 90 top
U$156  [3#3V1]  40.39,60.32 90 top
U$157  [SDA4]  42.93,60.32 90 top
U$158  [SCL2]  45.47,60.13 90 top
U$159  [PIO33]  48.01,60.32 90 top
U$160  [PIO29]  50.55,60.32 90 top
U$161  [GND0]  37.85,60.32 90 bottom
U$162  [3#3V1]  40.39,60.32 90 bottom
U$163  [PIO33]  48.01,60.32 90 bottom
U$164  [PIO29]  50.55,60.32 90 bottom
U$165  [PWR5]  34.04,64.2 90 top
U$166  [CON13]  56.9,64.26 90 top
U$167  [QWIIC_BLUETOOTH11]  38.23,79.95 0 top
U$168  [ADR8]  37.15,73.79 0 bottom
U$169  [I2C7]  46.99,62.36 0 bottom
U$170  [PWR5]  37.15,66.8 0 bottom
U$171  [QWIIC-LOGO-SMALL]  56.2,62.42 0 bottom
U$172  [SDA4]  42.93,60.32 90 bottom
U$173  [PIO110]  53.09,60.39 90 top
U$174  [PIO110]  53.09,60.39 90 bottom
U$175  [HC1X12]  42.54,78.3 0 top
U$176  [PAIR15]  33.78,79.12 0 top
U$177  [GND0]  63.75,60.32 90 top
U$178  [3#3V1]  66.29,60.32 90 top
U$179  [SDA4]  68.83,60.32 90 top
U$180  [SCL2]  71.37,60.13 90 top
U$181  [PIO33]  73.91,60.32 90 top
U$182  [PIO29]  76.45,60.32 90 top
U$183  [GND0]  63.75,60.32 90 bottom
U$184  [3#3V1]  66.29,60.32 90 bottom
U$185  [PIO33]  73.91,60.32 90 bottom
U$186  [PIO29]  76.45,60.32 90 bottom
U$187  [PWR5]  59.94,64.2 90 top
U$188  [CON13]  82.8,64.26 90 top
U$189  [QWIIC_BLUETOOTH11]  64.14,79.95 0 top
U$190  [ADR8]  63.06,73.79 0 bottom
U$191  [I2C7]  72.9,62.36 0 bottom
U$192  [PWR5]  63.06,66.8 0 bottom
U$193  [QWIIC-LOGO-SMALL]  82.11,62.42 0 bottom
U$194  [SDA4]  68.83,60.32 90 bottom
U$195  [PIO110]  78.99,60.39 90 top
U$196  [PIO110]  78.99,60.39 90 bottom
U$197  [HC1X12]  68.45,78.3 0 top
U$198  [PAIR15]  59.69,79.12 0 top

## Library data of the parts
C1 C2 C5 C6 C9 C10 C13 C14 C17 C18 C21 C22 C25 C26 C29 C30 C33 C34 = SparkFun-Capacitors; PROD_ID: CAP-00810
C3 C7 C11 C15 C19 C23 C27 C31 C35 = SparkFun-Capacitors; PROD_ID: CAP-08280
C4 C8 C12 C16 C20 C24 C28 C32 C36 = SparkFun-Capacitors; PROD_ID: CAP-11015
D1 D4 D6 D8 D10 D12 D14 D16 D18 = SparkFun-LED; PROD_ID: DIO-00821
D2 D3 D5 D7 D9 D11 D13 D15 D17 = SparkFun-LED; PROD_ID: DIO-00819
E$1-E$4 JP5-JP8 JP15-JP18 JP25-JP28 JP35-JP38 JP45-JP48 JP55-JP58 JP65-JP68 JP75-JP78 JP85-JP88 LOGO1 LOGO5 LOGO8 LOGO11 LOGO14 LOGO17 LOGO20 LOGO23 LOGO26 = SparkFun-Aesthetics
E$5 E$6 = SparkFun-Retired
J1 J5 J6 J10 J11 J15 J16 J20 J21 J25 J26 J30 J31 J35 J36 J40 J41 J45 = SparkFun-Connectors
J2 J3 J7 J8 J12 J13 J17 J18 J22 J23 J27 J28 J32 J33 J37 J38 J42 J43 = SparkFun-Connectors; PROD_ID: CONN-13694
J4 J9 J14 J19 J24 J29 J34 J39 J44 LOGO2-LOGO4 LOGO6 LOGO7 LOGO9 LOGO10 LOGO12 LOGO13 LOGO15 LOGO16 LOGO18 LOGO19 LOGO21 LOGO22 LOGO24 LOGO25 LOGO27 = SparkX
JP1-JP4 JP9 JP10 JP19-JP22 JP29-JP32 JP39-JP42 JP49-JP52 JP59-JP62 JP69-JP72 JP79-JP82 JP89 JP90 = SparkFun-Jumpers
JP11-JP14 JP23 JP24 JP33 JP34 JP43 JP44 JP53 JP54 JP63 JP64 JP73 JP74 JP83 JP84 = SparkFun-Hardware
R1 R8 R13 R18 R23 R28 R33 R38 R43 = SparkFun-Resistors; PROD_ID: RES-07857
R2 R3 R6 R7 R11 R12 R16 R17 R21 R22 R26 R27 R31 R32 R36 R37 R41 R42 = SparkFun-Resistors; PROD_ID: RES-08272
R4 R10 R15 R20 R25 R30 R35 R40 R45 = SparkFun-Resistors; PROD_ID: RES-00818
R5 R9 R14 R19 R24 R29 R34 R39 R44 = SparkFun-Resistors; PROD_ID: RES-07856
S1-S9 = SparkFun-Switches; PROD_ID: SWCH-13065
U1 U4 U6 U8 U10 U12 U14 U16 U18 = Qwiic-Bluetooth-HC1x; PROD_ID: IC-09092
U2 U3 U5 U7 U9 U11 U13 U15 U17 U$1-U$20 U$22-U$38 U$40-U$60 U$62-U$82 U$84-U$104 U$106-U$126 U$128-U$148 U$150-U$170 U$172-U$192 U$194-U$198 = Qwiic-Bluetooth-HC1x
U$21 U$39 U$61 U$83 U$105 U$127 U$149 U$171 U$193 = Labels

## Nets
3.3V: C1.1 C2.1 C3.1 C4.1 J1.2 J2.2 J3.2 J4.2 JP3.2 R1.2 R5.2 U1.8 U2.9
3.3V1: C5.1 C6.1 C7.1 C8.1 J6.2 J7.2 J8.2 J9.2 JP10.2 R8.2 R9.2 U3.9 U4.8
3.3V2: C9.1 C10.1 C11.1 C12.1 J11.2 J12.2 J13.2 J14.2 JP22.2 R13.2 R14.2 U5.9 U6.8
3.3V3: C13.1 C14.1 C15.1 C16.1 J16.2 J17.2 J18.2 J19.2 JP32.2 R18.2 R19.2 U7.9 U8.8
3.3V4: C17.1 C18.1 C19.1 C20.1 J21.2 J22.2 J23.2 J24.2 JP42.2 R23.2 R24.2 U9.9 U10.8
3.3V5: C21.1 C22.1 C23.1 C24.1 J26.2 J27.2 J28.2 J29.2 JP52.2 R28.2 R29.2 U11.9 U12.8
3.3V6: C25.1 C26.1 C27.1 C28.1 J31.2 J32.2 J33.2 J34.2 JP62.2 R33.2 R34.2 U13.9 U14.8
3.3V7: C29.1 C30.1 C31.1 C32.1 J36.2 J37.2 J38.2 J39.2 JP72.2 R38.2 R39.2 U15.9 U16.8
3.3V8: C33.1 C34.1 C35.1 C36.1 J41.2 J42.2 J43.2 J44.2 JP82.2 R43.2 R44.2 U17.9 U18.8
!RST: J1.5 R1.1 U1.1
!RST1: J6.5 R8.1 U4.1
!RST2: J11.5 R13.1 U6.1
!RST3: J16.5 R18.1 U8.1
!RST4: J21.5 R23.1 U10.1
!RST5: J26.5 R28.1 U12.1
!RST6: J31.5 R33.1 U14.1
!RST7: J36.5 R38.1 U16.1
!RST8: J41.5 R43.1 U18.1
ADR: J1.1 JP2.2 U1.6
ADR1: J6.1 JP9.2 U4.6
ADR2: J11.1 JP21.2 U6.6
ADR3: J16.1 JP31.2 U8.6
ADR4: J21.1 JP41.2 U10.6
ADR5: J26.1 JP51.2 U12.6
ADR6: J31.1 JP61.2 U14.6
ADR7: J36.1 JP71.2 U16.6
ADR8: J41.1 JP81.2 U18.6
BT-RXI: U1.3 U2.4
BT-RXI1: U3.4 U4.3
BT-RXI2: U5.4 U6.3
BT-RXI3: U7.4 U8.3
BT-RXI4: U9.4 U10.3
BT-RXI5: U11.4 U12.3
BT-RXI6: U13.4 U14.3
BT-RXI7: U15.4 U16.3
BT-RXI8: U17.4 U18.3
BT-TXO: U1.2 U2.2
BT-TXO1: U3.2 U4.2
BT-TXO2: U5.2 U6.2
BT-TXO3: U7.2 U8.2
BT-TXO4: U9.2 U10.2
BT-TXO5: U11.2 U12.2
BT-TXO6: U13.2 U14.2
BT-TXO7: U15.2 U16.2
BT-TXO8: U17.2 U18.2
GND: C1.2 C2.2 C3.2 C4.2 D1.C J1.6 J2.1 J3.1 J4.1 JP2.1 JP4.1 S1.1 S1.2 U1.4 U2.12
GND1: C5.2 C6.2 C7.2 C8.2 D4.C J6.6 J7.1 J8.1 J9.1 JP9.1 JP19.1 S2.1 S2.2 U3.12 U4.4
GND2: C9.2 C10.2 C11.2 C12.2 D6.C J11.6 J12.1 J13.1 J14.1 JP21.1 JP29.1 S3.1 S3.2 U5.12 U6.4
GND3: C13.2 C14.2 C15.2 C16.2 D8.C J16.6 J17.1 J18.1 J19.1 JP31.1 JP39.1 S4.1 S4.2 U7.12 U8.4
GND4: C17.2 C18.2 C19.2 C20.2 D10.C J21.6 J22.1 J23.1 J24.1 JP41.1 JP49.1 S5.1 S5.2 U9.12 U10.4
GND5: C21.2 C22.2 C23.2 C24.2 D12.C J26.6 J27.1 J28.1 J29.1 JP51.1 JP59.1 S6.1 S6.2 U11.12 U12.4
GND6: C25.2 C26.2 C27.2 C28.2 D14.C J31.6 J32.1 J33.1 J34.1 JP61.1 JP69.1 S7.1 S7.2 U13.12 U14.4
GND7: C29.2 C30.2 C31.2 C32.2 D16.C J36.6 J37.1 J38.1 J39.1 JP71.1 JP79.1 S8.1 S8.2 U15.12 U16.4
GND8: C33.2 C34.2 C35.2 C36.2 D18.C J41.6 J42.1 J43.1 J44.1 JP81.1 JP89.1 S9.1 S9.2 U17.12 U18.4
KEY-HM1: JP20.1 U3.8
KEY-HM2: JP30.1 U5.8
KEY-HM3: JP40.1 U7.8
KEY-HM4: JP50.1 U9.8
KEY-HM5: JP60.1 U11.8
KEY-HM6: JP70.1 U13.8
KEY-HM7: JP80.1 U15.8
KEY-HM8: JP90.1 U17.8
KEY-HM17: JP1.1 U2.8
N$1: D2.C JP4.2
N$2: D1.A R4.1
N$3: D2.A R5.1
N$4: JP1.2 S1.3 S1.4
N$5: D3.A R9.1
N$6: D3.C JP19.2
N$7: D4.A R10.1
N$8: JP20.2 S2.3 S2.4
N$9: D5.A R14.1
N$10: D5.C JP29.2
N$11: D6.A R15.1
N$12: JP30.2 S3.3 S3.4
N$13: D7.A R19.1
N$14: D7.C JP39.2
N$15: D8.A R20.1
N$16: JP40.2 S4.3 S4.4
N$17: D9.A R24.1
N$18: D9.C JP49.2
N$19: D10.A R25.1
N$20: JP50.2 S5.3 S5.4
N$21: D11.A R29.1
N$22: D11.C JP59.2
N$23: D12.A R30.1
N$24: JP60.2 S6.3 S6.4
N$25: D13.A R34.1
N$26: D13.C JP69.2
N$27: D14.A R35.1
N$28: JP70.2 S7.3 S7.4
N$29: D15.A R39.1
N$30: D15.C JP79.2
N$31: D16.A R40.1
N$32: JP80.2 S8.3 S8.4
N$33: D17.A R44.1
N$34: D17.C JP89.2
N$35: D18.A R45.1
N$36: JP90.2 S9.3 S9.4
PIO0/KEY-HM1: JP20.3 U3.16
PIO0/KEY-HM2: JP30.3 U5.16
PIO0/KEY-HM3: JP40.3 U7.16
PIO0/KEY-HM4: JP50.3 U9.16
PIO0/KEY-HM5: JP60.3 U11.16
PIO0/KEY-HM6: JP70.3 U13.16
PIO0/KEY-HM7: JP80.3 U15.16
PIO0/KEY-HM8: JP90.3 U17.16
PIO0/KEY-HM11: JP1.3 U2.16
PIO1: J10.2 U3.14
PIO1/LED: J5.3 R4.2 U2.15
PIO1/LED1: J10.3 R10.2 U3.15
PIO1/LED2: J15.3 R15.2 U5.15
PIO1/LED3: J20.3 R20.2 U7.15
PIO1/LED4: J25.3 R25.2 U9.15
PIO1/LED5: J30.3 R30.2 U11.15
PIO1/LED6: J35.3 R35.2 U13.15
PIO1/LED7: J40.3 R40.2 U15.15
PIO1/LED8: J45.3 R45.2 U17.15
PIO2: J5.2 U2.14
PIO3: J5.1 U2.13
PIO4: J10.1 U3.13
PIO5: J15.2 U5.14
PIO6: J15.1 U5.13
PIO7: J20.2 U7.14
PIO8: J20.1 U7.13
PIO9: J25.2 U9.14
PIO10: J25.1 U9.13
PIO11: J30.2 U11.14
PIO12: J30.1 U11.13
PIO13: J35.2 U13.14
PIO14: J35.1 U13.13
PIO15: J40.2 U15.14
PIO16: J40.1 U15.13
PIO17: J45.2 U17.14
PIO18: J45.1 U17.13
SCL: J1.3 J2.4 J3.4 J4.4 R3.1 U1.7
SCL1: J6.3 J7.4 J8.4 J9.4 R6.1 U4.7
SCL2: J11.3 J12.4 J13.4 J14.4 R11.1 U6.7
SCL3: J16.3 J17.4 J18.4 J19.4 R16.1 U8.7
SCL4: J21.3 J22.4 J23.4 J24.4 R21.1 U10.7
SCL5: J26.3 J27.4 J28.4 J29.4 R26.1 U12.7
SCL6: J31.3 J32.4 J33.4 J34.4 R31.1 U14.7
SCL7: J36.3 J37.4 J38.4 J39.4 R36.1 U16.7
SCL8: J41.3 J42.4 J43.4 J44.4 R41.1 U18.7
SCL_PU1: JP3.1 R3.2
SCL_PU2: JP10.1 R6.2
SCL_PU3: JP22.1 R11.2
SCL_PU4: JP32.1 R16.2
SCL_PU5: JP42.1 R21.2
SCL_PU6: JP52.1 R26.2
SCL_PU7: JP62.1 R31.2
SCL_PU8: JP72.1 R36.2
SCL_PU9: JP82.1 R41.2
SDA: J1.4 J2.3 J3.3 J4.3 R2.1 U1.5
SDA1: J6.4 J7.3 J8.3 J9.3 R7.1 U4.5
SDA2: J11.4 J12.3 J13.3 J14.3 R12.1 U6.5
SDA3: J16.4 J17.3 J18.3 J19.3 R17.1 U8.5
SDA4: J21.4 J22.3 J23.3 J24.3 R22.1 U10.5
SDA5: J26.4 J27.3 J28.3 J29.3 R27.1 U12.5
SDA6: J31.4 J32.3 J33.3 J34.3 R32.1 U14.5
SDA7: J36.4 J37.3 J38.3 J39.3 R37.1 U16.5
SDA8: J41.4 J42.3 J43.3 J44.3 R42.1 U18.5
SDA_PU1: JP3.3 R2.2
SDA_PU2: JP10.3 R7.2
SDA_PU3: JP22.3 R12.2
SDA_PU4: JP32.3 R17.2
SDA_PU5: JP42.3 R22.2
SDA_PU6: JP52.3 R27.2
SDA_PU7: JP62.3 R32.2
SDA_PU8: JP72.3 R37.2
SDA_PU9: JP82.3 R42.2